# EAGLE board additive_vco_hagiwo_panel (EAGLE 9.6.2)
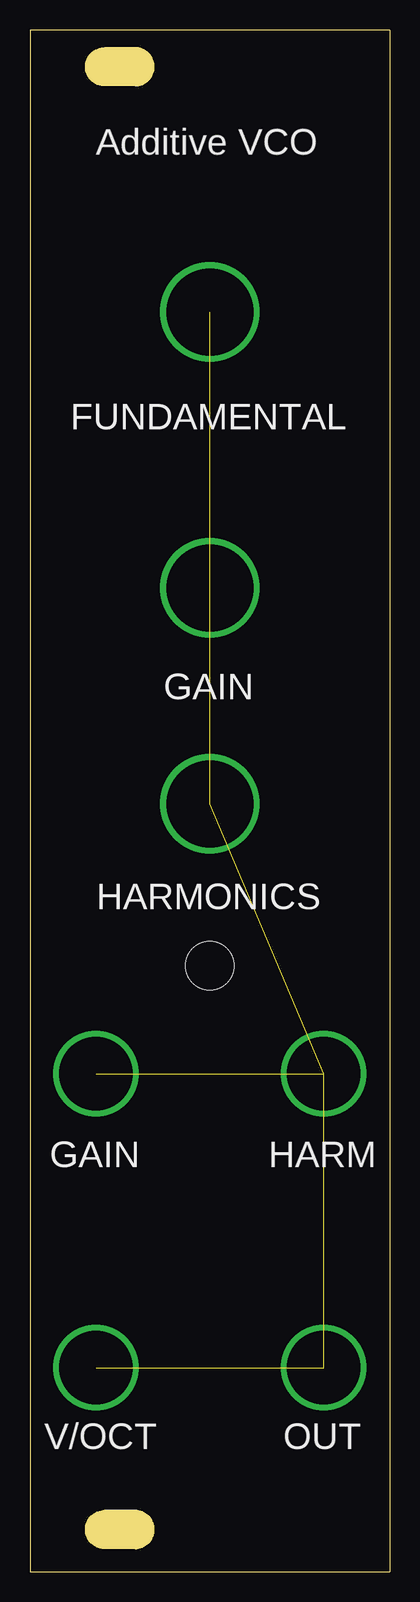
[diagram p0: board, top side]
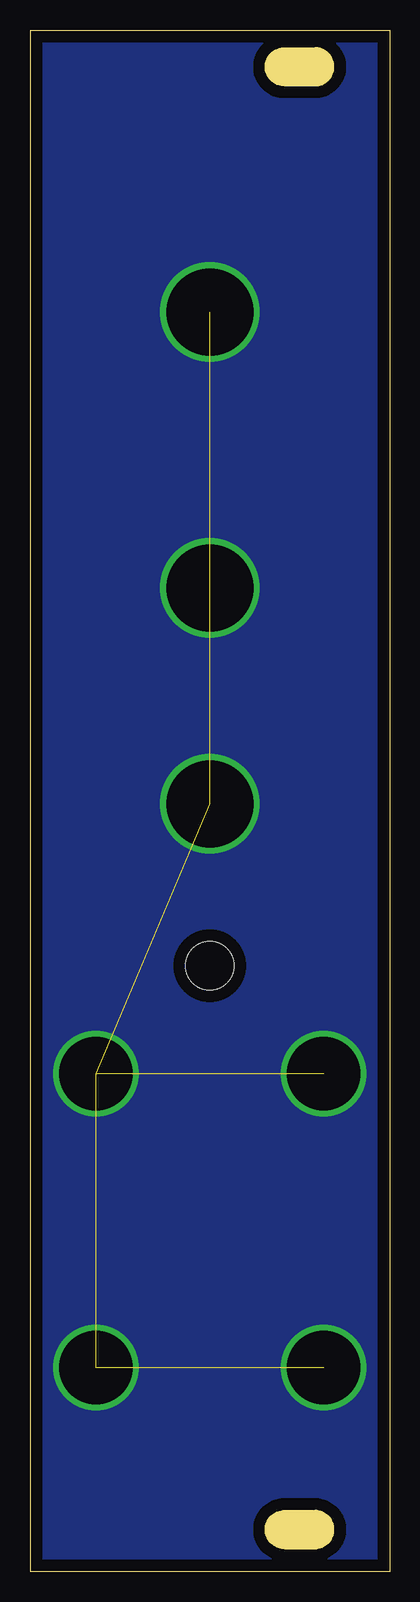
[diagram p1: board, bottom side, seen from below]

Size 30 x 128.5 mm. Coordinates in mm from the lower left corner, seen from the top.
Outline: 30,128.5 0,128.5 0,0 30,0 30,128.5
Copper layers (1*16): Top 0.035mm / dielectric 1.5mm / Bottom 0.035mm
Design rules "default": minimum track width 6mil, minimum drill 0.35mm, track to track 6mil, track to pad 6mil, pad to pad 6mil, via to via 6mil, smd to smd 6mil, copper to edge 40mil, drill to drill 6mil, minimum pad ring 10mil, minimum via ring 8mil, stop-mask expansion 4mil, vias tented up to drill 0mil, thermal gap 10mil
Holes 4 mm at 15,50.5

## Placement (x,y rotation side)
E$1  [ADDITIVE_VCO_PANEL1]  0,0 0 top
U$1  [SLOT_HOLE]  7.5,3.5 180 top
U$2  [SLOT_HOLE]  7.5,125.44 180 top

## Library data of the parts
E$1 = todstuff
U$1 U$2 = MusicThingModular

## Tracks (layer width: path | path; a pad name or v marks a point on that pad's centre or on a via)
GND  (via drill 6.1, 7.25)  (6 unrouted)
  other vias: 15,64 24.5,41.5 5.5,41.5 24.5,17 5.5,17 15,82 15,105
  pour Bottom: -0.5,-1.02 -0.5,129.56 31,129.56 31,-1

## Text on the board
tPlace: Additive VCO | FUNDAMENTAL | GAIN | HARMONICS | GAIN | HARM | V/OCT | OUT